# EAGLE board Experiment 7 (EAGLE 9.7.0)

Size 86.96 x 48.32 mm. Coordinates in mm from the lower left corner, seen from the top.
Outline: 0,0 86.97,0 86.97,48.32 0,48.32 0,0
Copper layers (1*16): Top 0.035mm / dielectric 1.5mm / Bottom 0.035mm
Design rules "default": minimum track width 6mil, minimum drill 0.35mm, track to track 6mil, track to pad 6mil, pad to pad 6mil, via to via 6mil, smd to smd 6mil, copper to edge 40mil, drill to drill 6mil, minimum pad ring 10mil, minimum via ring 8mil, stop-mask expansion 4mil, vias tented up to drill 0mil, thermal gap 10mil

## Footprints (pad centres in the part's own frame; a part is rotated, then mirrored left to right if it is on the bottom)
CAP-THRU-2.54MM = drill 1.016 pad 1.88: 1 -1.27,0; 2 1.27,0
BATTERY-GENERIC = drill 1.118 pad 3.15 octagon: + 2.54,0; - -2.54,0
RESAD1016W63L850D250B = drill 0.83 pad 1.43: 1 -5.08,0; 2 5.08,0

## Placement (x,y rotation side)
C1  1u  [CAP-THRU-2.54MM]  81.25,5.97 0 top
FUNCFG1  FUNCTION-GENERATOR  [BATTERY-GENERIC]  8.26,40.06 180 top
R1  1k  [RESAD1016W63L850D250B]  74.9,11.05 0 top

## Library data of the parts
C1 FUNCFG1 R1 = Tinkercad

## Nets
FUNCFG1+: FUNCFG1.+ R1.1
FUNCFG1-: C1.2 FUNCFG1.-
R1_2: C1.1 R1.2

## Tracks (layer width: path | path; a pad name or v marks a point on that pad's centre or on a via)
FUNCFG1+  (1 unrouted)
FUNCFG1-  (1 unrouted)
R1_2  (1 unrouted)